# Altium PCB Project Dial MLB.PcbDoc
Units mil, origin at the board's own origin, x right, y up, seen from the top; angles counter-clockwise.
Board outline 1536.17 x 1593.43 mil, 2 copper layers (Top Layer, Bottom Layer); 24 components, 15 nets, 74 pads, 38 vias.
Unrouted connection lines stored in the file: 5.
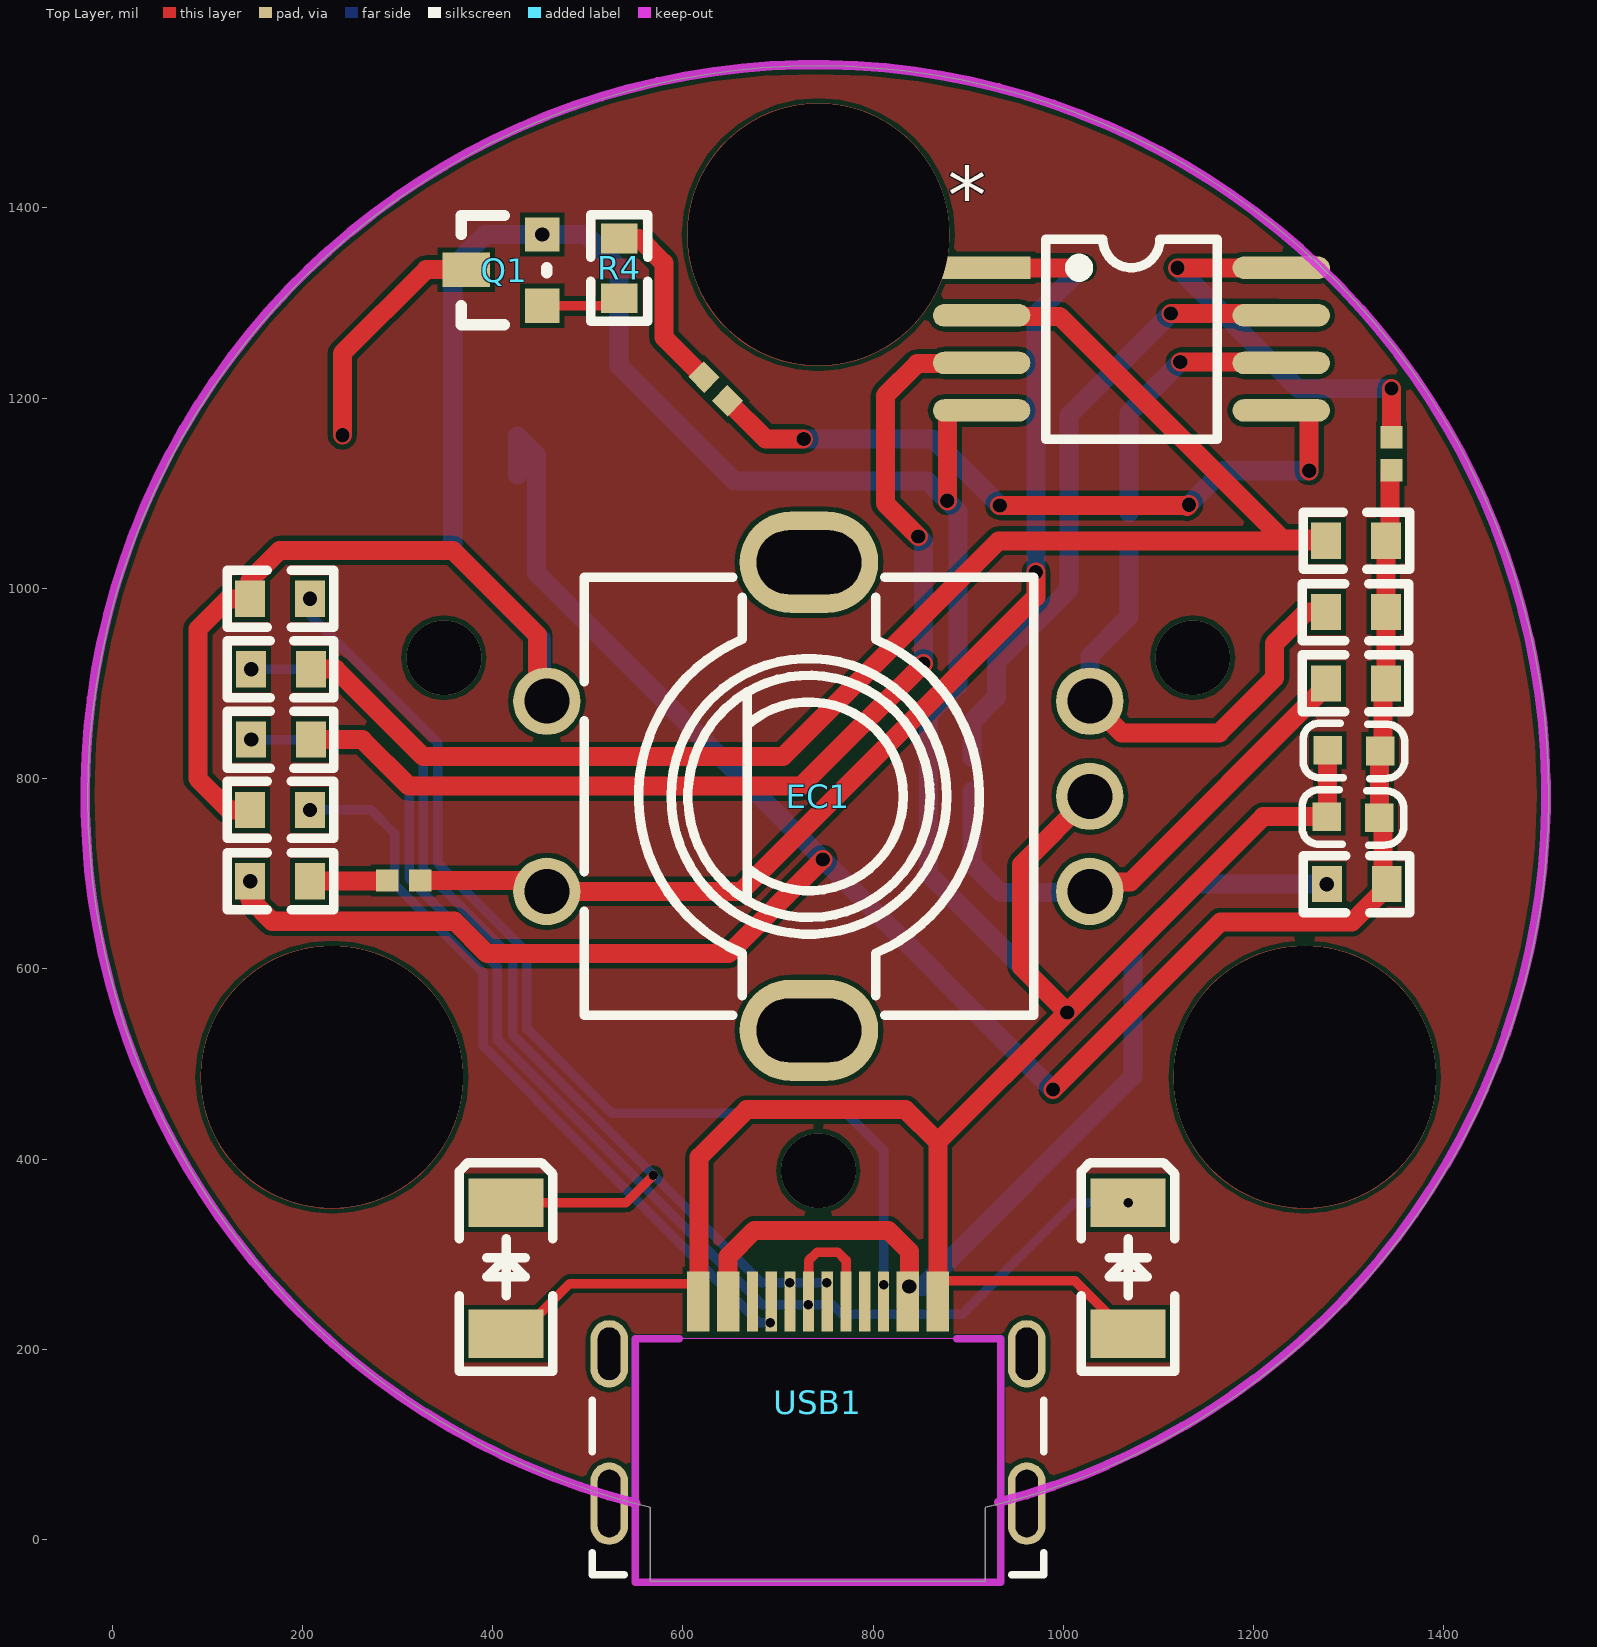
[diagram p0: Top Layer view]
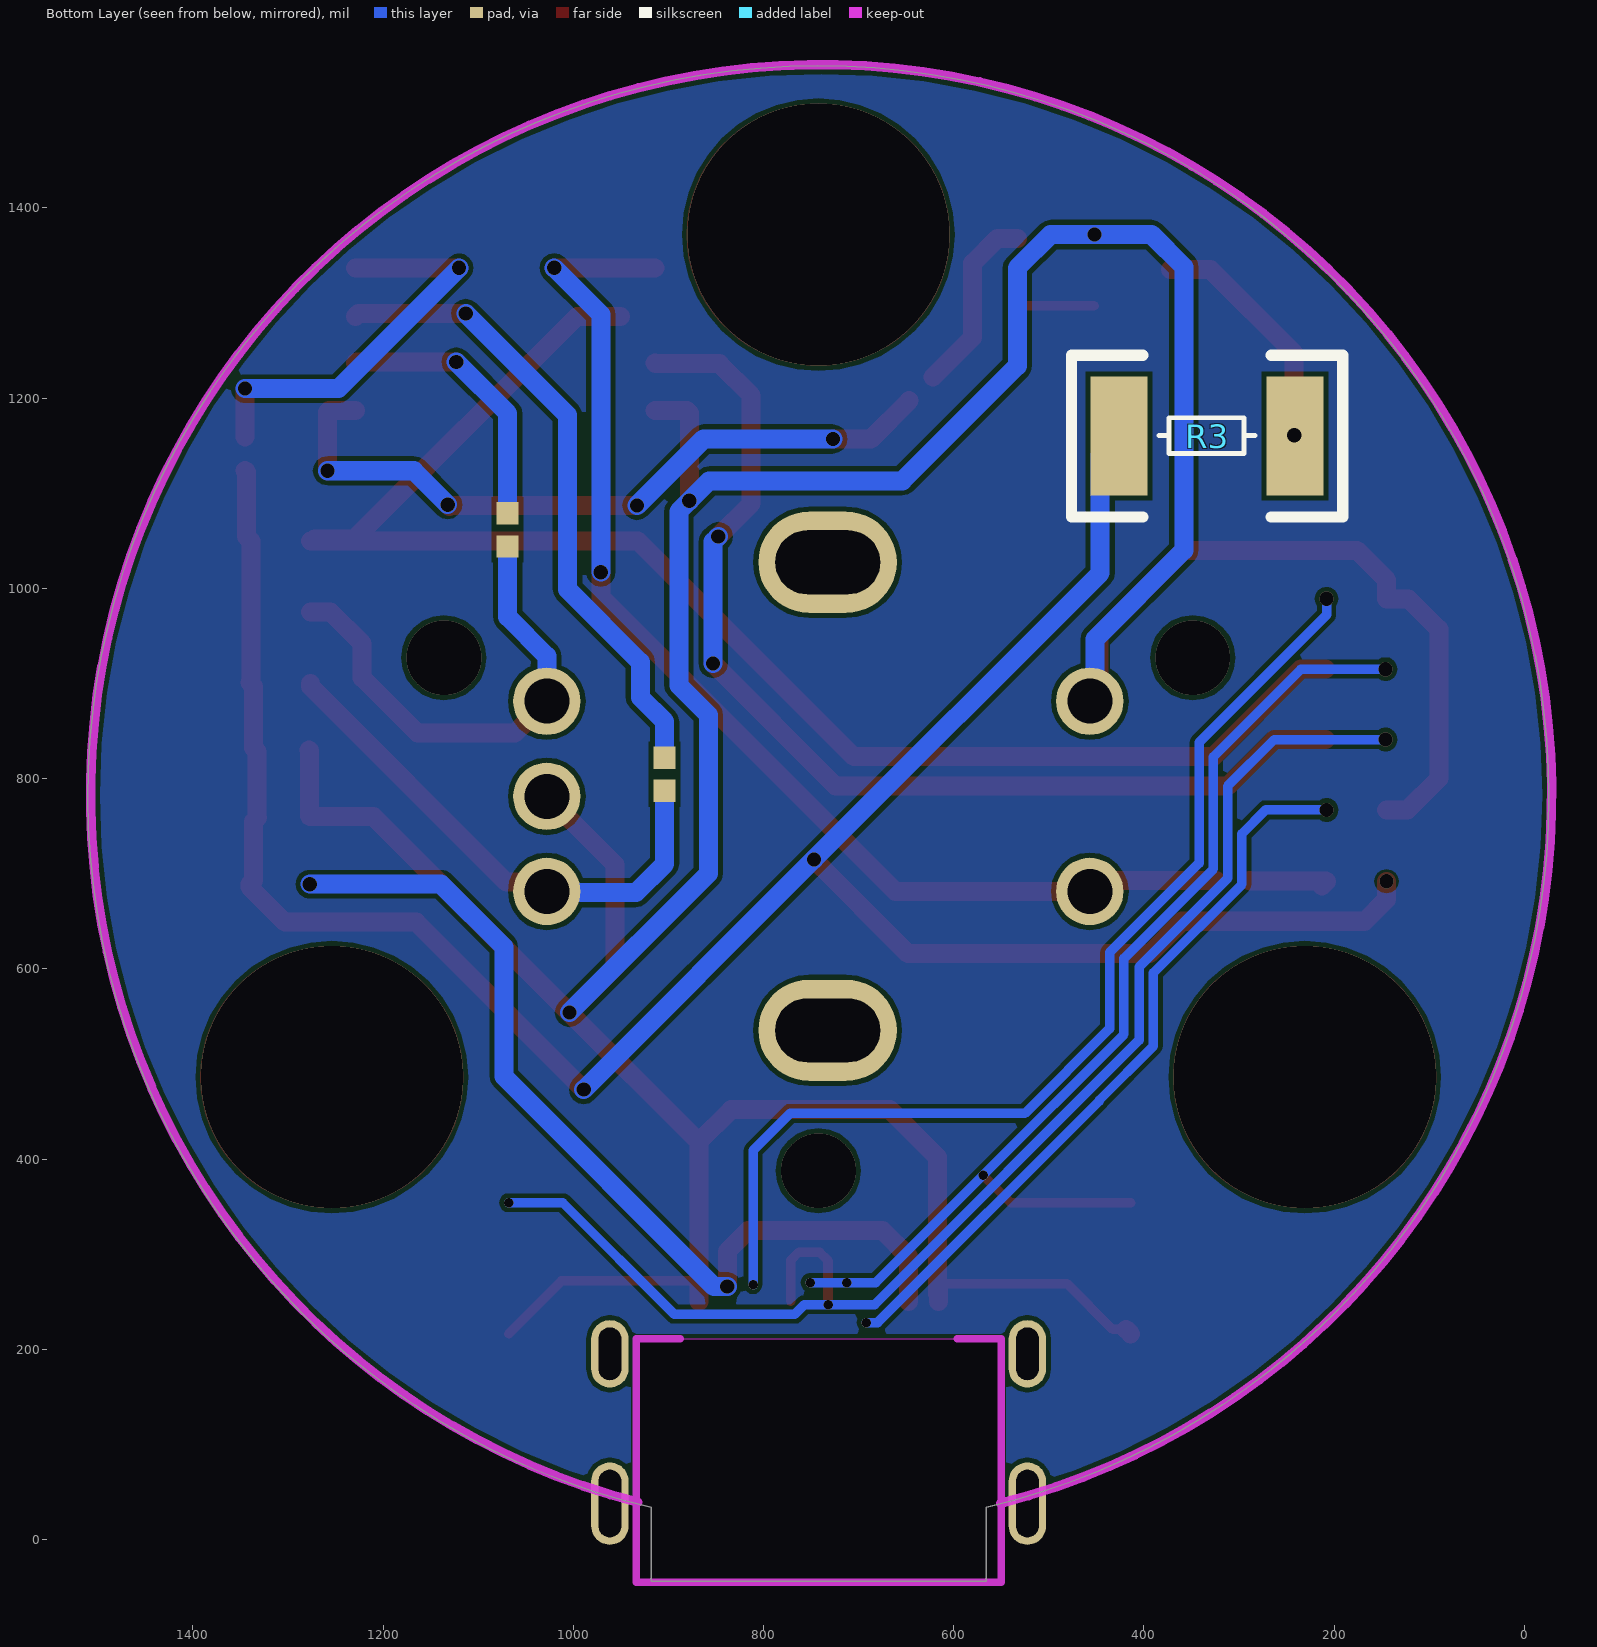
[diagram p1: Bottom Layer view, seen from below]

## Layer stack, top to bottom
Top Solder: solder mask 0.4, Solder Resist, Dk 3.5
Top Layer: signal copper 1.4
Dielectric 1: dielectric 12.6, FR-4, Dk 4.8
Bottom Layer: signal copper 1.4
Bottom Solder: solder mask 0.4, Solder Resist, Dk 3.5

## Board outline
565.55,-44 565.55,33.88 cw(c742.34,781.34) 918.2,33.66 918,33.46 918,-44

## Design rules (kind name [scope] priority, off if disabled: settings)
Clearance [All] p1: gap=5 ignorepadtopadclearanceinfootprint=FALSE
PolygonConnect [All] p1: connectstyle=Relief reliefconductorwidth=10 reliefentries=4 polygonreliefangle="90 Angle" airgapwidth=10
RoutingVias [All] p1: holewidth=28 width=50 viastyle="Through Hole" minholewidth=28 minwidth=50 maxholewidth=28 maxwidth=50
SolderMaskExpansion [All] p1: expansion=4
Width [All] p1: maxlimit=50 minlimit=1 preferedwidth=20
30 further rules are at their usual default settings.

## Classes and differential pairs
polygon class PolygonClass_1: "Top Layer-No Net"
component class "Project Dial MLB": * C5 C6 EC1 F1 Q1 R1 R2 R3 R4 R5 R6 R7 R8 R9 R10 USB1

## Components (designator, comment, footprint, x,y, rotation, side; value= is the part's Value field where it differs from the comment)
* "attiny85" SOP8W 914.04,1337 r0 top
C5 "0.1uF" 0603C 1277.79,830.35 r0 top
C6 "4.7uF" 0603C 1276.79,760.35 r0 top
D1 "3.6 Zener" LL34 1068,216.2 r90 top
D2 "3.6 Zener" LL34 414,216.2 r90 top
EC1 "EC11E1834403" SW-TH_EC11E1820402 742.34,781.34 r90 top
F1 "500ma" 0603R 1277.01,689 r0 top
Q1 "S8050" SOT-23 417,1332 r90 top
R1 "66.5" 0603R 146,915 r0 top
R2 "66.5" 0603R 146,841 r0 top
R3 "Taptic Engine" 1812R 241.11,1160 r0 bottom
R4 "1K" 0603R 533,1368 r270 top
R5 "1.5k" 0603R 1338.99,1050 r180 top
R6 "4.7K" 0603R 1276,975 r0 top
R7 "4.7K" 0603R 207.99,692 r180 top
R8 "4.7K" 0603R 1276,900 r0 top
R9 "5.1k" 0603R 208,989 r180 top
R10 "5.1k" 0603R 208,767 r180 top
USB1 "TYPE_C" TYPE-C_A 742,83 r0 top
? "Comment" jumper 274,693 r90 top
? "Comment" jumper 611.39,1232.61 r45 top
? "Comment" jumper 904,837 r180 bottom
? "Comment" jumper 1069,1029 r0 bottom
? "Comment" jumper 1345,1174 r0 top

## Footprints (in the part's own frame and the unit in brackets; to place one, negate y for a bottom-side part, rotate by r counter-clockwise, add the part's x,y. Pads: shape width x height; smd on the part's side, far side on the other; paste and mask are expansions set on the pad)
0603C [mil]
  rect 30x30 smd: 1(0.21,-0.35) 2(55.21,-1.35)
  silkscreen extent -26,-30 81,28, body extent -1,-15 62,17, height 12
0603R [mm]
  rect 0.8x0.965 smd: 1(0,0) 2(1.6,0)
  silkscreen extent -0.64,-0.76 2.21,0.76, body extent -0.04,-0.41 1.56,0.41, height 0.45
1812R [mil]
  rect 60x125 smd: 1(0,0) 2(185,0)
  silkscreen extent -50,-85 235,85, body extent -4,-63 174,63, height 24
jumper [mil]
  rect 23x23.62 smd: 1(0,-15) 2(0,-50)
LL34 [mm] "玻封二极管"
  rect 1.3x2 smd: A(0,0) K(3.5,0)
  silkscreen extent -1,-1.25 4.57,1.25, body extent -0.1,-0.75 3.4,0.75, height 1.5
SOP8W [mm]
  rect 2.6x0.6 smd: 1(0,0)
  oval 2.6x0.6 smd: 2(0,-1.27) 3(0,-2.54) 4(0,-3.81) 5(8,-3.81) 6(8,-2.54) 7(8,-1.27) 8(8,0)
  silkscreen extent 1.71,-4.57 6.29,0.76, body extent 0.25,-4.57 8.13,0.71, height 1.9
SOT-23 [mil]
  rect 36x36 smd: B(-35,-35) E(40,-35)
  rect 36x50 smd: C(3,45)
  silkscreen extent -55,-40 60,50, body extent -54,-48 60,62, height 47
SW-TH_EC11E1820402 [mm]
  round 1.8 hole 1.2: A(-2.54,-7.25) B(2.54,-7.25) C(0,-7.25) D(-2.54,7.25) E(2.54,7.25)
  oval 2.7x3.7 hole 1.7 slot 2.8 at 90 deg: F(6.25,0.25) G(-6.25,0.25)
  silkscreen extent -5.85,-5.75 5.85,6.25
TYPE-C_A [mm]
  oval 1x2.2 hole 0.6 slot 1.8 at 90 deg: 0(-5.575,-1.15) 0(5.575,-1.15)
  oval 1x1.8 hole 0.6 slot 1.4 at 90 deg: 0(-5.575,2.85) 0(5.575,2.85)
  rect 0.6x1.6 smd: A1B12(-3.2,4.25) A4B9(-2.4,4.25) B1A12(3.2,4.25) B4A9(2.4,4.25)
  rect 0.3x1.6 smd: A5(-1.25,4.25) A6(-0.25,4.25) A7(0.25,4.25) A8(1.25,4.25) B5(1.75,4.25) B6(0.75,4.25) B7(-0.75,4.25) B8(-1.75,4.25)
  Keep-Out Layer board cut-out: -4.875,-3.25 4.875,-3.25 4.875,3.25 -4.875,3.25
  Keep-Out Layer lines w0.2: -3.7,3.25 -4.875,3.25 -4.875,-3.25 4.875,-3.25 4.875,3.25 3.7,3.25
  silkscreen extent -6.03,-3.05 6.03,1.61

## Part data
C5 C6: library part CAP, "无极性电容"
D1 D2: library part DIODE-ZENER-BZT52, "Zener Diode Production Part - 8199 3.4V Zener Voltage", DeviceName=-BZT52, DeviceSetName=DIODE-ZENER, GateName_1=G$1, LibraryName=SparkFun, SymbolName_1=DIODE-ZENER
F1: library part R
Q1: library part NPN, "NPN三极管"
R1 R2 R3 R4 R5 R6 R7 R8 R9 R10: library part RES

## Via types
v1: diameter 15, hole 15, Top Layer to Bottom Layer, 25 vias
v2: diameter 10, hole 10, Top Layer to Bottom Layer, 7 vias
v3: diameter 78.74, hole 78.74, Top Layer to Bottom Layer, 3 vias
v4: diameter 275.59, hole 275.59, Top Layer to Bottom Layer, 3 vias

## Nets (pads, with @x,y where several pads share a name; then routed paths per layer and width w, separated by ;. In a path a pad name is that pad's centre, name@x,y a point inside that pad or via, vN(x,y) a via of type N, cw(c..) or ccw(c..) an arc to the next point about the centre after c; other vN are vias at no path point)
+5V: *.8 ?.1@1345,1159 ?.2@1345,1124 C5.2 C6.2 F1.2 R3.2 R5.1 R6.2 R7.2 R8.2 | length 2969.5
  Top Layer w20: v1(145,692) 145,673 168,650 360,650 394,616 648,616 v1(747,715) ; v1(989,473) 1165,649 1303.25,649 1340,685.75 F1.2 1336,693 1336,755 C6.2 1332.5,759.5 1332.5,828.5 C5.2 1336,832 1336,897 R8.2 ; v1(1120,1337) *.8 ; R6.2 1338.99,902.01 1340,901 R8.2@1339.5,900.5 ; R6.2@1338.99,976 R5.1 1343.5,1054.51 1343.5,1122.5 ?.2@1345,1124 ; ?.1@1345,1159 v1(1345,1210)
  Bottom Layer w20: R3.2@426.11,1119.11 R3.2 446.11,1140 446.11,1015.89 v1(747,715) v1(989,473) ; v1(1120,1337) 1247,1210 v1(1345,1210)
A1: *.1 ?.1@289,693 ?.2@324,693 EC1.D R7.1 | length 1357.1
  Top Layer w20: R7.1@212.74,687.17 207.99,691.92 R7.1 208.49,692.5 288.5,692.5 ?.1@289,693 ; ?.2@324,693 431.48,693 437.31,687.17 451.07,687.17 EC1.D 661.34,681.34 971,991 v1(971,1017) ; *.1 v1(1020,1337)
  Bottom Layer w20: EC1.D@445.24,693 EC1.D ; v1(971,1017) 971,1288 v1(1020,1337)
D0: *.6 ?.1@1069,1044 ?.2@1069,1079 EC1.B R6.1 | length 810
  Top Layer w20: EC1.B 1061.11,848 1164,848 1222,906 1222,942 1255,975 R6.1 ; v1(1123,1238) 1228,1238 *.6
  Bottom Layer w10: EC1.B@1023,886.11 EC1.B
  Bottom Layer w20: EC1.B 1027.78,928.78 1069,970 ?.1@1069,1044 ; ?.2@1069,1079 1069,1184 v1(1123,1238)
D7: *.7 ?.1@904,822 ?.2@904,787 EC1.A R8.1 | length 1227.8
  Top Layer w20: EC1.A 1037.51,691.07 1070.32,691.07 1276,896.75 R8.1 ; v1(1113,1289) 1226,1289 *.7@1229,1286
  Bottom Layer w20: ?.2@904,787 904,710.21 934.21,680 1029.11,680 EC1.A ; ?.1@904,822 904,860 929.5,885.5 929.5,922.5 1006,999 1006,1182 v1(1113,1289)
D9: *.5 ?.1@622,1222 ?.2@646.75,1197.25 R4.1 | length 960.2
  Top Layer w20: R4.1 554,1368 580,1342 580,1264 ?.1@622,1222 ; ?.2@646.75,1197.25 687,1157 v1(727,1157) ; v1(933,1087.11) 1128.89,1087.11 1130,1086 v1(1132,1088) ; *.5 1256.7,1187 1258.37,1185.33 v1(1258.37,1123.63)
  Bottom Layer w20: v1(727,1157) 863.11,1157 v1(933,1087.11) ; v1(1132,1088) 1167.63,1123.63 v1(1258.37,1123.63)
D+: D1.K R2.1 USB1.A6 USB1.B6 | length 1455.1
  Top Layer w10: USB1.A6 732.16,293.16 741,302 763,302 771.53,293.47 USB1.B6
  Bottom Layer w10: v1(146,841) 263,841 312,792 312,695 405,602 405,525 683,247 v2(732,247) 757,247 767,237 894,237 1011,354 v2(1068,354)
D-: D2.K R1.1 USB1.A7 USB1.B7 | length 1155.2
  Top Layer w10: D2.K 540,354 v2(569,383)
  Bottom Layer w10: v1(146,915) 235,915 327,823 327,705 421,611 421,531 v2(569,383) 682,270 v2(751,270)
  other v2: 712.47,270
GND: *.4 C5.1 C6.1 D1.A D2.A EC1.C EC1.E Q1.E R9.2 R10.2 USB1.A1B12 USB1.B1A12 | length 4654.6
  Top Layer w10: D2.A@418.66,220.86 432.86,220.86 481,269 USB1.A1B12@616.02,269 ; USB1.B1A12@869.8,271.82 1012.39,271.82 D1.A
  Top Layer w20: R10.2 123,767 90,800 90,957 122,989 R9.2 145.01,1009.01 176,1040 358,1040 447.17,950.83 447.17,891.07 EC1.E ; D2.A D2.A@418.66,220.86 ; USB1.A1B12 USB1.A1B12@616.02,269 ; USB1.A1B12@617,258 617,402 667,452 833.97,452 867.98,417.98 ; USB1.B1A12 USB1.B1A12@867.98,270.01 ; USB1.B1A12@869.8,271.82 USB1.B1A12@867.98,270.01 ; v1(878,1092) 878,1184.33 880.67,1187 *.4 ; EC1.C 956,709.57 956,602 v1(1004,554) ; C5.1 1277.5,829.5 1277.5,760.5 C6.1 1210,760 v1(1004,554) ; USB1.B1A12@867.98,270.01 867.98,417.98 ; 867.98,417.98 v1(1004,554)
  Bottom Layer w20: EC1.E 451.23,887.01 451.23,946.77 358,1040 358,1338 392,1372 v1(452,1372) 498,1372 533,1337 533,1234 654,1113 857,1113 v1(878,1092) 889,1081 889,898 858,867 858,700 v1(1004,554)
NetF1_1: F1.1 USB1.A4B9 USB1.B4A9 | length 989.2
  Top Layer w20: USB1.A4B9 647.51,297.51 675,325 816,325 838,303 v1(838,266)
  Bottom Layer w20: v1(838,266) 852.17,266 1073,486.83 1073,623 1139,689 v1(1277.01,689)
NetQ1_B: Q1.B R4.2 | length 84.3
  Top Layer w10: Q1.B 524.99,1297 R4.2
NetQ1_C: Q1.C R3.1 | length 252.5
  Top Layer w20: v1(242,1161) 242,1247 330,1335 Q1.C
NetR9_1: R9.1 USB1.B5 | length 1115.3
  Bottom Layer w10: v1(208,989) 208,972 342,838 342,711.21 436,617.21 436,537.21 525.21,448 772,448 811,409 v2(811,268)
NetR10_1: R10.1 USB1.A5 | length 784
  Bottom Layer w10: v1(208,767) 272,767 297,742 297,688.79 390,595.79 390,518.79 447,461.79 447,461 680,228 v2(692,228)
PB3: *.2 R1.2 R5.2 | length 1617.6
  Top Layer w20: R1.2 235,915 327,823 705,823 932,1050 R5.2 ; *.2@950.46,1286 996,1286 1230,1052 R5.2@1272,1052
PB4: *.3 R2.2 | length 1131.4
  Top Layer w20: R2.2 263,841 312,792 724,792 v1(853,921) ; v1(847.5,1054.5) 813,1089 813,1203 846.31,1236.31 913.35,1236.31 *.3
  Bottom Layer w20: v1(847.5,1054.5) 853,1049 v1(853,921)
pads on no net: EC1.F EC1.G USB1.0 USB1.A8 USB1.B8
copper on no net: | length 2597.4
  Top Layer w0.5: v4@368.7,486.06 ccw(c230.9,486.06) v4@368.7,486.06 ; v4@880.13,1371.89 ccw(c742.34,1371.89) v4@880.13,1371.89 ; v4@1391.56,486.06 ccw(c1253.77,486.06) v4@1391.56,486.06
  other v3: 742.34,387.64 348.64,927.01 1136.04,927.01
  other v4: 230.9,486.06 1253.77,486.06 742.34,1371.89

## Polygon pours and split planes (outlines as drawn)
no net on Bottom Layer "Top Layer-No Net1" (solid, pour order 33): 565.55,-44 565.55,33.88 cw(c742.34,781.34) 918.2,33.66 918,33.46 918,-44
no net on Top Layer "Top Layer-No Net" (solid, pour order 32): 565.55,-44 565.55,33.88 cw(c742.34,781.34) 918.2,33.66 918,33.46 918,-44

## Keep-outs
Keep-Out Layer:
  lines w10: 550.36,38.14 cw(c739.47,782.58) 932.14,39.05

## Silkscreen, mask and mechanical layers (free items; w line width, h text height)
Bottom Overlay:
Bottom Solder:
  text "Design by /    Eddy" at 1379,1113 h45 r90